# EAGLE board Arduino-Pro-Mini-v10 KeyPad interface V2 (EAGLE 5.10)
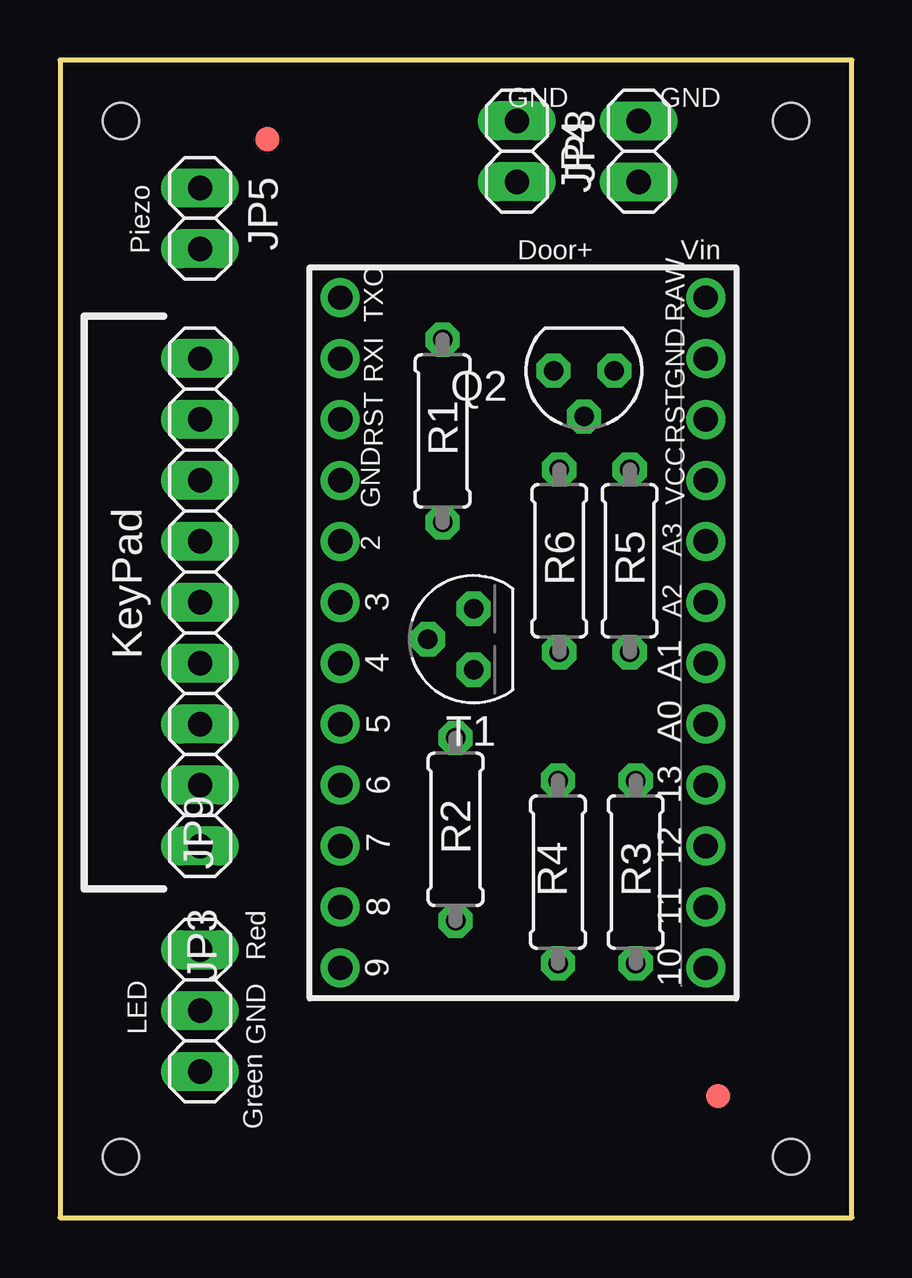
[diagram p0: board, top side]
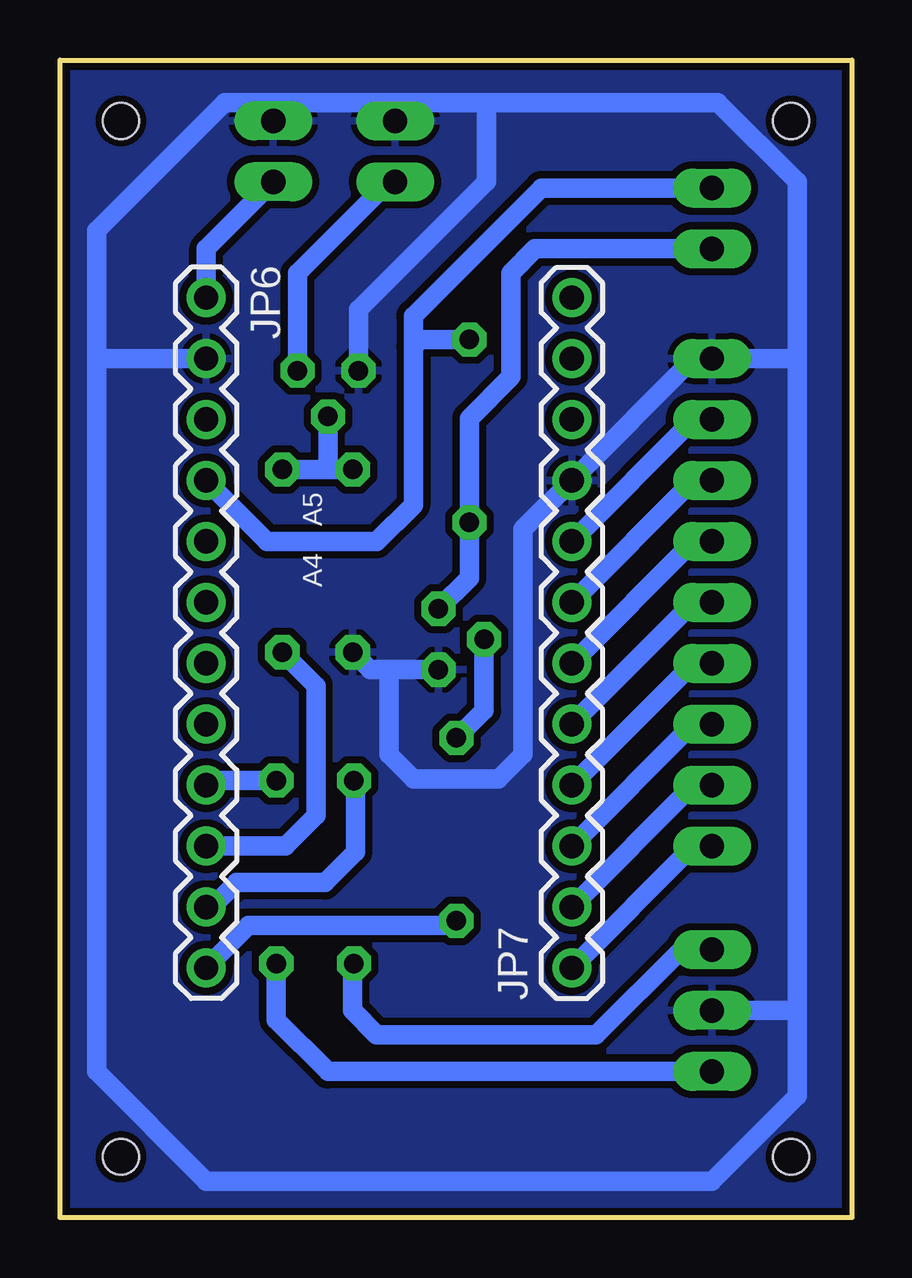
[diagram p1: board, bottom side, seen from below]

Size 33.02 x 48.26 mm. Coordinates in mm from the lower left corner, seen from the top.
Outline: 0,48.26 0,0 33.02,0 33.02,48.26 0,48.26
Copper layers (1*16): Top 0.035mm / dielectric 1.5mm / Bottom 0.035mm
Design rules "SparkFun *": minimum track width 8mil, minimum drill 20mil, track to track 8mil, track to pad 8mil, pad to pad 8mil, via to via 8mil, smd to smd 8mil, copper to edge 10mil, drill to drill 8mil, minimum pad ring 12mil, minimum via ring 10mil, stop-mask expansion 4mil, vias tented up to drill 20mil, thermal gap 10mil
Net classes: 0 default: width 0.203 mm; 1 vcc: width 0.254 mm
Holes 1.5 mm at 2.54,2.54 30.48,2.54 30.48,45.72 2.54,45.72

## Footprints (pad centres in the part's own frame; a part is rotated, then mirrored left to right if it is on the bottom)
1X09 = drill 1.016 long: 1 -10.16,0; 2 -7.62,0; 3 -5.08,0; 4 -2.54,0; 5 0,0; 6 2.54,0; 7 5.08,0; 8 7.62,0; 9 10.16,0
1X02 = drill 1.016 long: 1 -1.27,0; 2 1.27,0
1X12 = drill 1.016 round: 1 0,0; 2 2.54,0; 3 5.08,0; 4 7.62,0; 5 10.16,0; 6 12.7,0; 7 15.24,0; 8 17.78,0; 9 20.32,0; 10 22.86,0; 11 25.4,0; 12 27.94,0
1X03 = drill 1.016 long: 1 -2.54,0; 2 0,0; 3 2.54,0
SOT54E = drill 0.813 octagon: D -1.27,0; G 0,1.905; S 1.27,0
0207/7 = drill 0.813 octagon: 1 -3.81,0; 2 3.81,0
TO92 = drill 0.813 octagon: 1 1.27,0; 2 0,1.905; 3 -1.27,0
FIDUCIAL-1X2 = smd 1 x 1: 1 0,0

## Placement (x,y rotation side)
JP3  [1X09]  5.84,25.65 90 top
JP4  [1X02]  24.13,44.45 270 top
JP5  [1X02]  5.84,41.66 90 top
JP6  [1X12]  26.92,38.35 270 bottom
JP7  [1X12]  11.68,10.41 90 bottom
JP8  [1X02]  19.05,44.45 90 top
JP9  [1X03]  5.84,8.64 270 top
Q2  BS170  [SOT54E]  21.84,35.31 180 top
R1  1k  [0207/7]  15.95,32.79 90 top
R2  1k  [0207/7]  16.49,16.19 270 top
R3  [0207/7]  24,14.41 90 top
R4  [0207/7]  20.76,14.41 90 top
R5  1k  [0207/7]  23.75,27.38 270 top
R6  1meg  [0207/7]  20.81,27.38 270 top
T1  2N3904  [TO92]  17.24,24.12 90 top
U$2  FIDUCIAL1X2  [FIDUCIAL-1X2]  27.43,5.08 0 top
U$4  FIDUCIAL1X2  [FIDUCIAL-1X2]  8.64,44.96 0 top

## Library data of the parts
JP3 JP4 JP8 = pinhead
JP5 = pinhead; FUNCTION: Piezo
JP6 JP7 U$2 U$4 = SparkFun
JP9 = pinhead; FUNCTION: Red/Green LED
Q2 = transistor-small-signal
R1-R6 = rcl
T1 = transistor-neu-to92

## Nets
D02: JP3.8 JP7.8
D03: JP3.7 JP7.7
D04: JP3.6 JP7.6
D05: JP3.5 JP7.5
D06: JP3.4 JP7.4
D07: JP3.3 JP7.3
D08: JP3.2 JP7.2
D09: JP3.1 JP7.1
D10: JP6.12 R2.2
D11: JP6.11 R4.2
D12: JP6.10 R5.2
D13: JP6.9 R3.2
GND [vcc]: JP3.9 JP4.1 JP6.2 JP7.9 JP8.2 JP9.2 Q2.S R6.2 T1.3
N$2: JP8.1 Q2.D
N$10: R2.1 T1.2
N$11: JP5.1 R1.1 T1.1
N$13: JP9.3 R3.1
N$15: JP9.1 R4.1
N$19: Q2.G R5.1 R6.1
RAW: JP4.2 JP6.1
VCC: JP5.2 JP6.4 R1.2

## Tracks (layer width: path | path; a pad name or v marks a point on that pad's centre or on a via)
D02
  Bottom 0.813: JP3.8 6.6,33.27 JP7.8
D03
  Bottom 0.813: JP3.7 6.6,30.73 JP7.7
D04
  Bottom 0.813: JP3.6 6.6,28.19 JP7.6
D05
  Bottom 0.813: JP3.5 6.6,25.65 JP7.5
D06
  Bottom 0.813: JP3.4 6.6,23.11 JP7.4
D07
  Bottom 0.813: JP3.3 6.6,20.57 JP7.3
D08
  Bottom 0.813: JP3.2 6.6,18.03 JP7.2
D09
  Bottom 0.813: JP3.1 6.6,15.49 JP7.1
D10
  Bottom 0.813: JP6.12 25.15,12.19 16.68,12.19 R2.2
D11
  Bottom 0.813: JP6.11 26.67,12.95 25.65,13.97 21.97,13.97 20.7,15.24 20.7,18.16 R4.2
D12
  Bottom 0.813: JP6.10 23.62,15.49 22.35,16.76 22.35,22.18 R5.2
D13
  Bottom 0.813: R3.2 26.74,18.22 JP6.9
GND
  Bottom 0.813: 26.76,35.65 JP6.2 31.24,35.81 31.5,36.07 | 31.5,36.07 31.5,41.15 26.16,46.48 24.13,46.48 | 19.05,46.48 20.32,46.48 | 14.99,46.48 19.05,46.48 | 24.13,46.48 20.32,46.48 | 20.32,46.48 20.07,46.23 | Q2.S 20.57,37.85 15.24,43.18 15.24,46.23 14.99,46.48 | 14.99,46.48 5.59,46.48 2.29,43.18 2.29,36.07 | 2.29,8.64 2.29,5.08 5.84,1.52 26.92,1.52 31.5,6.1 31.5,36.07 | 2.29,8.64 2.29,36.07 | 2.29,8.64 JP9.2 | 2.29,36.07 2.54,35.81 JP3.9 6.6,35.81 JP7.9 13.72,28.7 13.72,19.3 14.73,18.29 18.29,18.29 19.3,19.3 19.3,22.85 | 19.3,22.85 T1.3 | 19.3,22.85 20.09,22.85 R6.2 | 19.05,46.48 JP8.2 | 24.13,46.48 JP4.1
  pour Bottom (isolate 0.305): 0,48.26 33.02,48.26 33.02,0 0,0
N$2
  Bottom 0.813: Q2.D 23.11,39.37 19.3,43.18 JP8.1
N$10
  Bottom 0.813: T1.2 15.34,21.15 R2.1
N$11
  Bottom 0.813: JP5.1 13.21,40.39 14.22,39.37 14.22,35.05 15.95,33.32 R1.1 15.95,26.68 T1.1
N$13
  Bottom 0.813: JP9.3 21.84,6.1 24,8.26 R3.1
N$15
  Bottom 0.813: JP9.1 7.11,11.18 10.67,7.62 19.81,7.62 20.83,8.64 20.83,10.54 R4.1
N$19
  Bottom 0.813: R6.1 22.1,31.19 | 22.1,31.19 R5.1 | Q2.G 21.84,31.45 22.1,31.19
RAW
  Bottom 0.813: JP6.1 26.92,40.39 JP4.2
VCC
  Bottom 0.813: 18.29,36.32 18.29,37.59 12.95,42.93 JP5.2 | R1.2 18.01,36.6 18.29,36.32 | 18.29,36.32 18.29,29.72 19.81,28.19 24.38,28.19 JP6.4

## Text on the board
tPlace: GND | GND | Piezo | Door+ | Vin | TXO | RAW | RXI | GND | RST | RST | KeyPad | GND | VCC | 2 | A3 | 3 | A2 | 4 | A1 | 5 | A0 | 6 | 13 | 7 | 12 | Red | 8 | 11 | LED | GND | 9 | 10 | Green
bPlace: A5 | A4